# EAGLE board GPS_module (EAGLE 9.5.0)
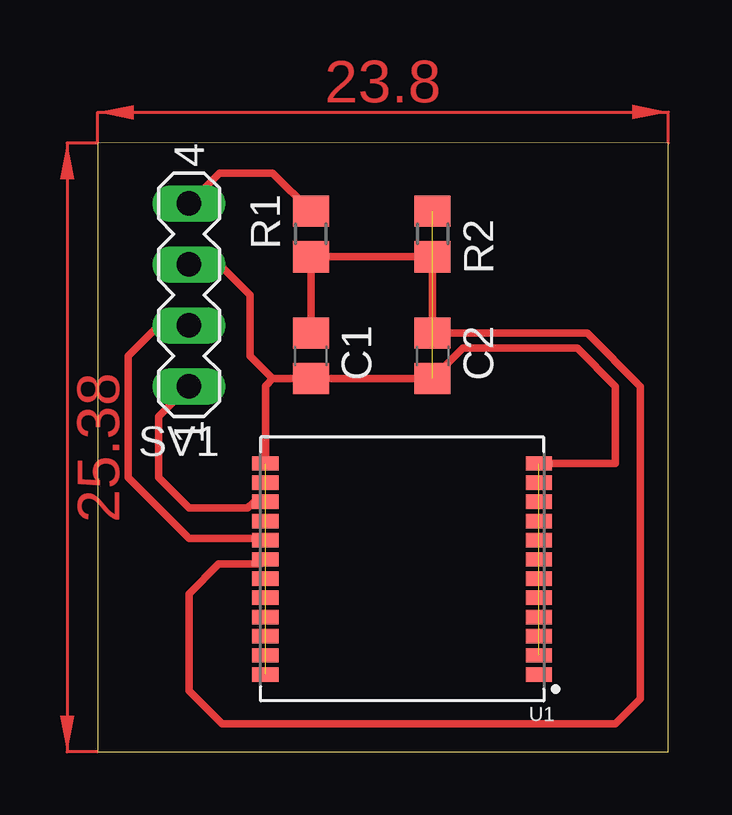
[diagram p0: board, top side]

Size 23.8 x 25.39 mm. Coordinates in mm from the lower left corner, seen from the top.
Outline: 23.8,0 23.8,25.39 0,25.38 0,0 23.8,0
Copper layers (1*16): Top 0.035mm / dielectric 1.5mm / Bottom 0.035mm
Design rules "default": minimum track width 6mil, minimum drill 0.35mm, track to track 6mil, track to pad 6mil, pad to pad 6mil, via to via 6mil, smd to smd 6mil, copper to edge 40mil, drill to drill 6mil, minimum pad ring 10mil, minimum via ring 8mil, stop-mask expansion 4mil, vias tented up to drill 0mil, thermal gap 10mil

## Footprints (pad centres in the part's own frame; a part is rotated, then mirrored left to right if it is on the bottom)
C0805 = smd 1.3 x 1.5: 1 -0.95,0; 2 0.95,0
R0805 = smd 1.3 x 1.5: 1 -0.95,0; 2 0.95,0
MA04-1 = drill 1.016 long: 1 -3.81,0; 2 -1.27,0; 3 1.27,0; 4 3.81,0
XCVR_SL876Q5A001T001000 = smd 1.1 x 0.6: 1 -5.7,4.4; 2 -5.7,3.6; 3 -5.7,2.8; 4 -5.7,2; 5 -5.7,1.2; 6 -5.7,0.4; 7 -5.7,-0.4; 8 -5.7,-1.2; 9 -5.7,-2; 10 -5.7,-2.8; 11 -5.7,-3.6; 12 -5.7,-4.4; 13 5.7,-4.4; 14 5.7,-3.6; 15 5.7,-2.8; 16 5.7,-2; 17 5.7,-1.2; 18 5.7,-0.4; 19 5.7,0.4; 20 5.7,1.2; 21 5.7,2; 22 5.7,2.8; 23 5.7,3.6; 24 5.7,4.4

## Placement (x,y rotation side)
C1  10µF  [C0805]  8.89,16.51 270 top
C2  100nF  [C0805]  13.97,16.51 270 top
R1  100  [R0805]  8.89,21.59 90 top
R2  120  [R0805]  13.97,21.59 270 top
SV1  [MA04-1]  3.81,19.05 90 top
U1  SL876Q5A001T001000  [XCVR_SL876Q5A001T001000]  12.7,7.62 180 top

## Library data of the parts
C1 C2 = rcl; SPICEPREFIX: C
R1 R2 = rcl; SPICEPREFIX: R
SV1 = con-lstb; OC_FARNELL: unknown; OC_NEWARK: unknown
U1 = SL876Q5A001T001000; AVAILABILITY: Unavailable; DESCRIPTION: Sl876q5-a Gnss Embedded Module; MF: Telit; MP: SL876Q5A001T001000; PACKAGE: None; PRICE: None

## Nets
GND: C1.2 C2.2 R2.1 SV1.3 U1.2 U1.3 U1.5 U1.10 U1.12 U1.13 U1.20 U1.24
RX: SV1.1 U1.15
TX: SV1.2 U1.17
VDD: R1.2 SV1.4
VIN: C1.1 C2.1 R1.1 R2.2 U1.18

## Tracks (layer width: path | path; a pad name or v marks a point on that pad's centre or on a via)
GND  (7 unrouted)
  Top 0.305: SV1.3 5.08,20.32 6.35,19.05 6.35,16.51 7.3,15.56 | 7.3,15.56 C1.2 C2.2 15.24,16.83 20,16.83 21.59,15.24 21.59,12.02 U1.12 | U1.13 7,15.26 7.3,15.56
RX
  Top 0.305: SV1.1 2.54,13.97 2.54,11.43 3.81,10.16 6.26,10.16 6.52,10.42 U1.15
TX
  Top 0.305: SV1.2 2.54,17.78 1.27,16.51 1.27,11.43 3.81,8.89 6.93,8.89 U1.17
VDD
  Top 0.305: SV1.4 5.08,24.13 7.3,24.13 R1.2
VIN
  Top 0.305: C1.1 R1.1 R2.2 C2.1 20.41,17.46 22.63,15.24 22.63,2.21 21.59,1.17 5.18,1.17 3.81,2.54 3.81,6.58 5.05,7.82 6.8,7.82 U1.18
(copper drawn outside any net)
  shapes: Top area x2